# Altium PCB AD_STM32_PCB.PcbDoc
Units mm, origin at the board's own origin, x right, y up, seen from the top; angles counter-clockwise.
Board outline 44.75 x 23.25 mm, 2 copper layers (Top Layer, Bottom Layer), stack 1.67 mm thick; 30 components, 26 nets, 139 pads, 20 vias.
Unrouted connection lines stored in the file: 4.
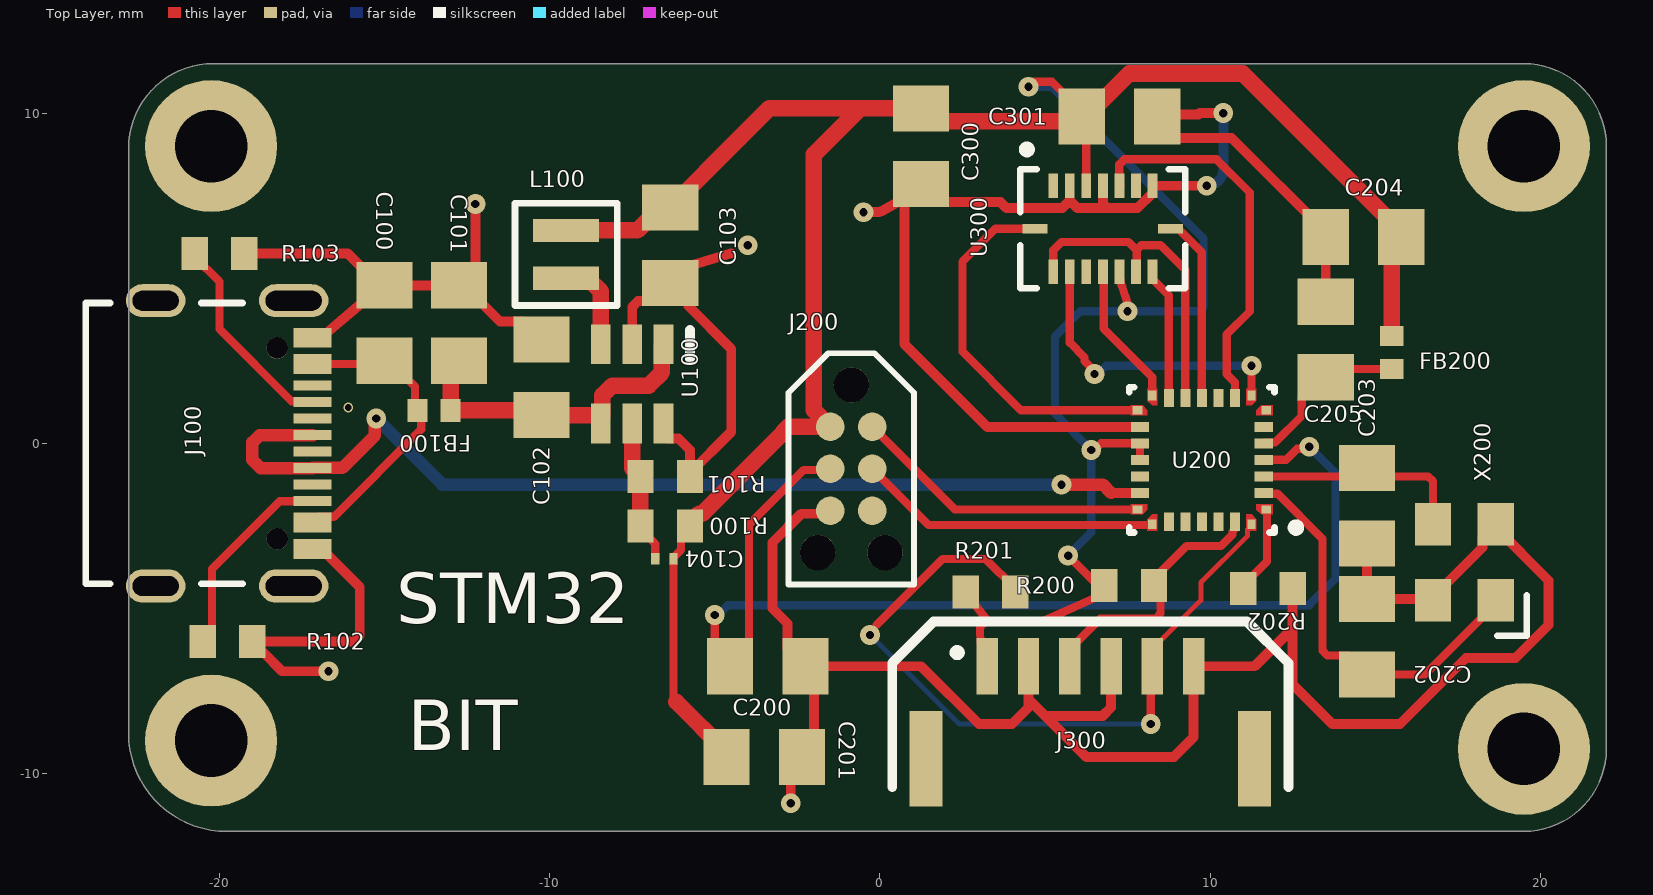
[diagram p0: Top Layer view]
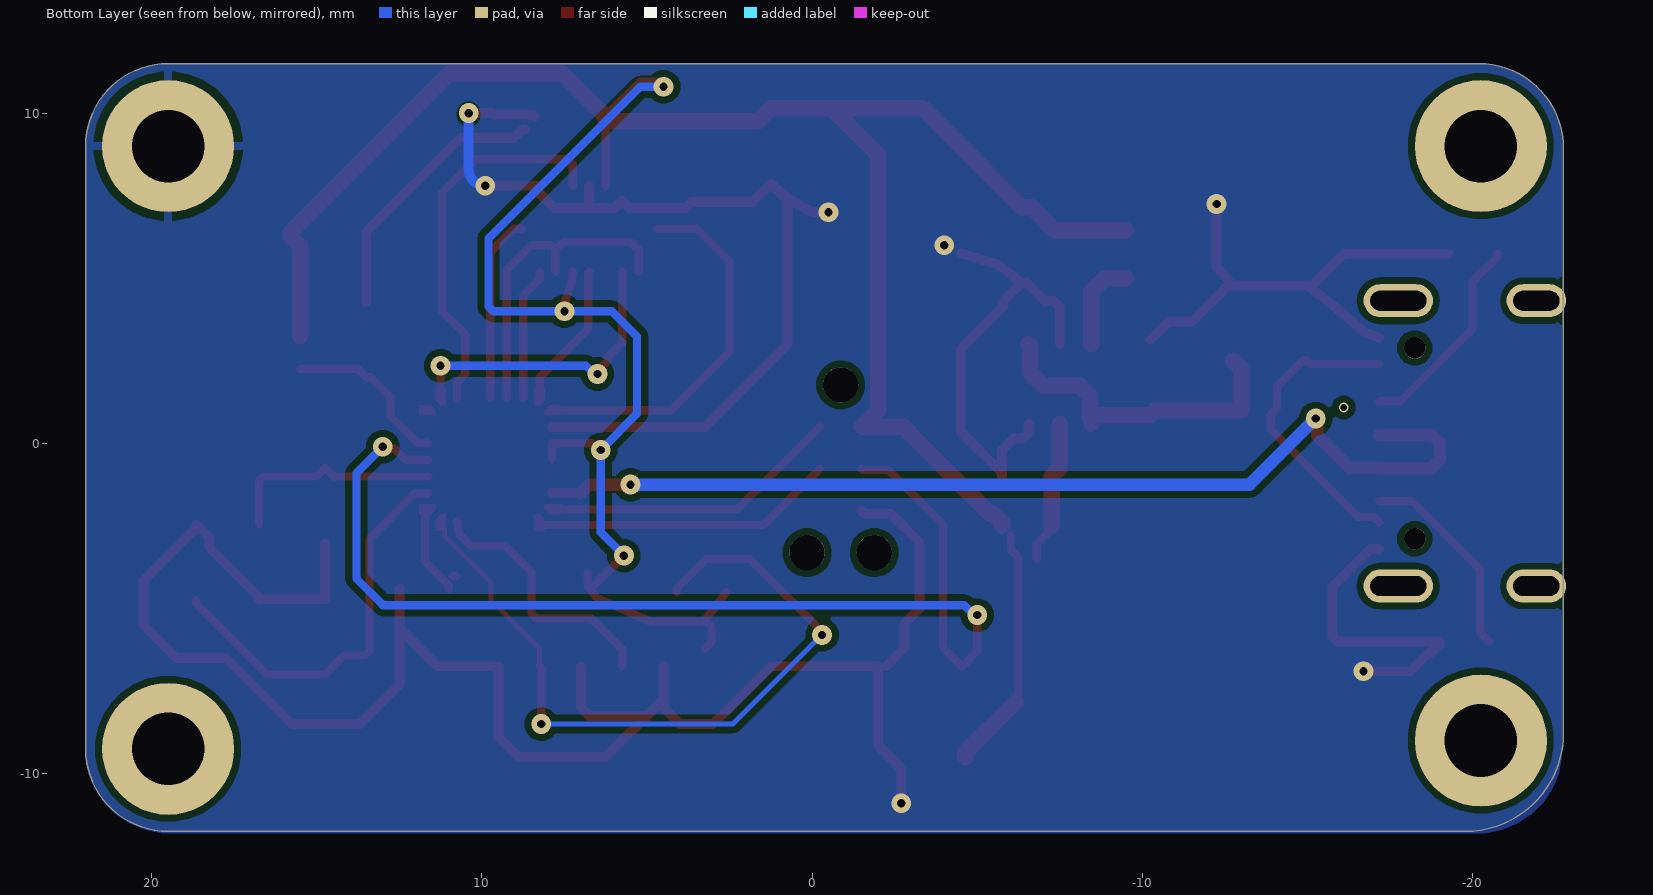
[diagram p1: Bottom Layer view, seen from below]
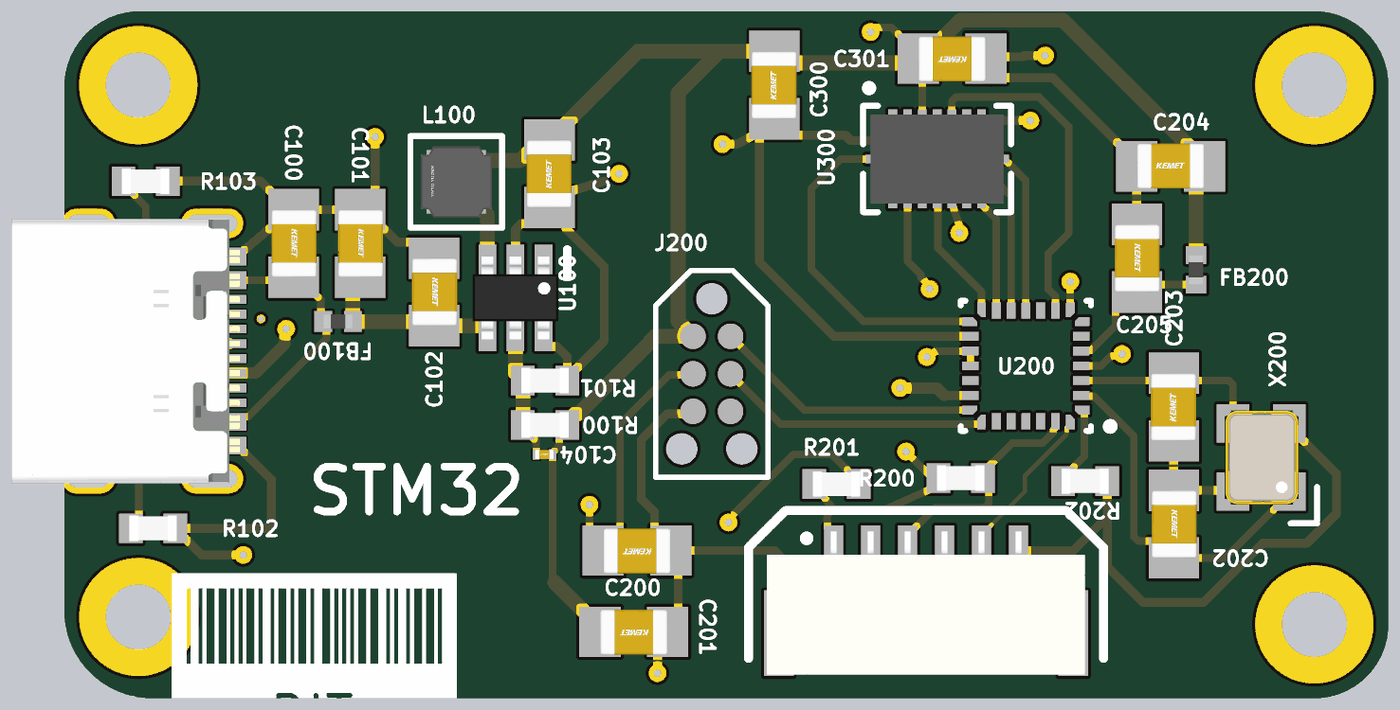
[diagram p2: 3D render of the assembled board from above, using the file's embedded part models]

## Layer stack, top to bottom
Top Solder: solder mask 0.0254, SM-001, Dk 4
Top Layer: signal copper 0.035
Dielectric 1: core 1.6, Core-043, Dk 4.6
Bottom Layer: signal copper 0.035
Bottom Solder: solder mask 0.0254, SM-001, Dk 4

## Board outline
-22.75,-8.775 -22.75,8.939 cw(c-20.189,8.939) -20.189,11.5 19.5,11.5 cw(c19.5,9) 22,9 22,-9.25 cw(c19.5,-9.25) 19.5,-11.75 -19.775,-11.75 cw(c-19.775,-8.775)

## Design rules (kind name [scope] priority, off if disabled: settings)
Clearance [All] p1: gap=0.2 ignorepadtopadclearanceinfootprint=FALSE except(0: Arc-Hole Track-Hole SMDPad-Hole THPad-Hole Via-Hole Fill-Hole Poly-Hole Region-Hole Text-Hole; 0.15: Arc-Arc Arc-Track Arc-SMDPad Track-Track Track-SMDPad SMDPad-SMDPad; 0.3: Arc-THPad Track-THPad SMDPad-THPad THPad-THPad)
DiffPairsRouting [All] p1: maxlimit=0.254 minlimit=0.254 mostfreqgap=0.254 toplayer_minwidth=0.381 toplayer_maxwidth=0.381 toplayer_prefwidth=0.381 bottomlayer_minwidth=0.381 bottomlayer_maxwidth=0.381 bottomlayer_prefwidth=0.381 maxuncoupledlength=12.7
PolygonConnect [All] p1: thpad.connectstyle=Relief thpad.reliefconductorwidth=0.254 thpad.reliefentries=4 thpad.polygonreliefangle="90 Angle" thpad.airgapwidth=0.254 smdpad.connectstyle=Relief smdpad.reliefconductorwidth=0.254 smdpad.reliefentries=4 smdpad.polygonreliefangle="90 Angle" smdpad.airgapwidth=0.254 via.connectstyle=Direct via.reliefconductorwidth=0.254 via.reliefentries=4 via.polygonreliefangle="90 Angle" via.airgapwidth=0.254
RoutingVias [All] p1: holewidth=0.25 width=0.7 viastyle="Through Hole" minholewidth=0.25 minwidth=0.6 maxholewidth=0.3 maxwidth=0.7
SolderMaskExpansion [All] p1: expansion=0.102 istentingtop=FALSE
UnRoutedNet [All] p1: checkbadconnections=TRUE
Width [All] p1: maxlimit=1 minlimit=0.15 preferedwidth=0.3
28 further rules are at their usual default settings.

## Classes and differential pairs
differential pair USB_D: +USB_D_P -USB_D_N

## Components (designator, comment, footprint, x,y, rotation, side; value= is the part's Value field where it differs from the comment)
C100 "100n" CAP_0805 -15,3.643 r270 top
C101 "100n" CAP_0805 -12.75,3.643 r270 top
C102 "4u7" CAP_0805 -10.25,2 r270 top
C103 "4u7" CAP_0805 -6.35,6 r90 top
C104 "22p" CAP_0201 -6.525,-3.5 r0 top
C200 "100n" CAP_0805 -3.393,-6.75 r180 top
C201 "100n" CAP_0805 -3.5,-9.5 r180 top
C202 "10p" CAP_0805 14.75,-5.857 r270 top
C203 "10p" CAP_0805 14.75,-1.893 r90 top
C204 "100n" CAP_0805 14.643,6.25 r0 top
C205 "100n" CAP_0805 13.5,3.143 r270 top
C300 "100n" CAP_0805 1.25,9 r90 top
C301 "100n" CAP_0805 7.257,9.9 r180 top
FB100 "120R" FB_0402 -13.5,1 r0 top
FB200 "120R" FB_0402 15.5,2.75 r270 top
J100 "USB4105-GF-A-060" USB4105-GF-A-060 -19.553,0 r270 top
J200 "TC2030-NL" TC2030-NL-FP -0.865,-0.77 r270 top locked
J300 "SM06B-GHS-TB" SM06B-GHS-TB 6.375,-8.15 r0 top
L100 "10u" FP-NRH2412-MFG -9.5,5.725 r90 top
R100 "887k" RES_0603 -6.5,-2.5 r0 top
R101 "280k" RES_0603 -6.5,-1 r180 top
R102 "5k1" RES_0603 -19.75,-6 r180 top
R103 "5k1" RES_0603 -20,5.75 r180 top
R200 "5k1" RES_0603 7.55,-4.3 r180 top
R201 "5k1" RES_0603 3.35,-4.5 r180 top
R202 "5k1" RES_0603 11.75,-4.4 r180 top
U100 "LTC3405ES6#TRMPBF" SOT-23-6 -7.5,1.8 r180 top
U200 "STM32F042G4U6TR" STM-UFQFPN28_V 9.75,-0.5 r180 top
U300 "BMI088" BMI088 6.75,6.5 r0 top
X200 "24MHz" XTAL_3225 17.7,-3.6 r90 top

## Footprints (in the part's own frame and the unit in brackets; to place one, negate y for a bottom-side part, rotate by r counter-clockwise, add the part's x,y. Pads: shape width x height; smd on the part's side, far side on the other; paste and mask are expansions set on the pad)
BMI088 [mm]
  rect 0.3x0.75 smd: 1(-1.5,1.3) 2(-1,1.3) 3(-0.5,1.3) 4(0,1.3) 5(0.5,1.3) 6(1,1.3) 7(1.5,1.3) 9(1.5,-1.3) 10(1,-1.3) 11(0.5,-1.3) 12(0,-1.3) 13(-0.5,-1.3) 14(-1,-1.3) 15(-1.5,-1.3)
  rect 0.75x0.3 smd: 8(2.05,0) 16(-2.05,0)
  silkscreen extent -2.5,-1.8 2.5,2.51, body extent -2.25,-1.5 2.25,1.5, height 1.01
CAP_0201 [mm]
  rect 0.25x0.35 smd mask+0.05: 1(-0.275,0) 2(0.275,0)
  body extent -0.32,-0.17 0.32,0.16, height 0.34
CAP_0805 [mm]
  rect 1.4x1.7 smd: 1(-1.143,0) 2(1.143,0)
  body extent -1.15,-0.76 1.15,0.79, height 1.01
FB_0402 [mm]
  rect 0.6x0.7 smd: 1(-0.5,0) 2(0.5,0)
  body extent -0.5,-0.25 0.5,0.25, height 0.51
FP-NRH2412-MFG [mm]
  rect 0.7x2 smd paste+0 mask+0: 1(-0.725,0) 2(0.725,0)
  silkscreen extent -1.55,-1.55 1.55,1.55, body extent -1.35,-1.35 1.35,1.35, height 0.25
RES_0603 [mm]
  rect 0.8x1 smd: 1(-0.75,0) 2(0.75,0)
  body extent -0.8,-0.43 0.8,0.43, height 0.52
SM06B-GHS-TB [mm]
  rect 0.65x1.7 smd: 1(-3.125,1.4) 2(-1.875,1.4) 3(-0.625,1.4) 4(0.625,1.4) 5(1.875,1.4) 6(3.125,1.4)
  rect 1x2.9 smd: ""(-4.975,-1.4) ""(4.975,-1.4)
  silkscreen extent -6,-2.25 6,2.75, body extent -5.38,-2.8 5.38,2.05, height 4.26
SOT-23-6 [mm]
  rect 0.6x1.2 smd: 1(-0.95,-1.2) 2(0,-1.2) 3(0.95,-1.2) 4(0.95,1.2) 5(0,1.2) 6(-0.95,1.2)
  silkscreen extent -1.75,-1.63 -1.75,-0.76, body extent -1.45,-1.4 1.45,1.4, height 1.45
STM-UFQFPN28_V [mm] "QFN, 28-Leads, Body 4.1x4.1mm, Pitch 0.5mm"
  rect 0.3x0.25 smd: 1(-1.95,1.5) 7(-1.95,-1.5) 15(1.95,-1.5) 21(1.95,1.5)
  rect 0.55x0.3 smd: 2(-1.875,1) 3(-1.875,0.5) 4(-1.875,0) 5(-1.875,-0.5) 6(-1.875,-1) 16(1.875,-1) 17(1.875,-0.5) 18(1.875,0) 19(1.875,0.5) 20(1.875,1)
  rect 0.25x0.3 smd: 8(-1.5,-1.95) 14(1.5,-1.95) 22(1.5,1.95) 28(-1.5,1.95)
  rect 0.3x0.55 smd: 9(-1,-1.875) 10(-0.5,-1.875) 11(0,-1.875) 12(0.5,-1.875) 13(1,-1.875) 23(1,1.875) 24(0.5,1.875) 25(0,1.875) 26(-0.5,1.875) 27(-1,1.875)
  Top Layer region: 1.35,2.15 1.35,1.65 1.505,1.65 1.65,1.795 1.65,2.15
  Top Layer region: 2.15,-1.35 1.65,-1.35 1.65,-1.505 1.795,-1.65 2.15,-1.65
  Top Layer region: -2.15,1.35 -1.65,1.35 -1.65,1.505 -1.795,1.65 -2.15,1.65
  Top Layer region: 2.15,1.35 1.65,1.35 1.65,1.505 1.795,1.65 2.15,1.65
  Top Layer region: 1.35,-2.15 1.35,-1.65 1.505,-1.65 1.65,-1.795 1.65,-2.15
  Top Layer region: -1.35,2.15 -1.35,1.65 -1.505,1.65 -1.65,1.795 -1.65,2.15
  Top Layer region: -1.35,-2.15 -1.35,-1.65 -1.505,-1.65 -1.65,-1.795 -1.65,-2.15
  Top Layer region: -2.15,-1.35 -1.65,-1.35 -1.65,-1.505 -1.795,-1.65 -2.15,-1.65
  silkscreen extent -2.98,-2.2 2.2,2.2, body extent -2.05,-2.05 2.05,2.05, height 0.6
TC2030-NL-FP [mil]
  round 33.98 smd: 1(-50,-25) 2(-50,25) 3(0,-25) 4(0,25) 5(50,-25) 6(50,25)
  round 42.01 hole 42.01 unplated: MH(-100,0) MH(100,40) MH(100,-40)
  silkscreen extent -138,-75 138,75
USB4105-GF-A-060 [mm]
  rect 0.6x1.15 smd mask+0.05: A1,B12(-3.2,2.378) A4,B9(-2.4,2.378) B1,A12(3.2,2.378) B4,A9(2.4,2.378)
  rect 0.3x1.15 smd mask+0.05: A5(-1.25,2.378) A6(-0.25,2.378) A7(0.25,2.378) A8(1.25,2.378) B5(1.75,2.378) B6(0.75,2.378) B7(-0.75,2.378) B8(-1.75,2.378)
  round 0.65 hole 0.65 unplated mask+0.05: MH(-2.89,1.303) MH(2.89,1.303)
  oval 1x2.1 hole 0.6 slot 1.7 at 90 deg: SH(-4.32,1.803) SH(4.32,1.803)
  oval 1x1.8 hole 0.6 slot 1.4 at 90 deg: SH(-4.32,-2.377) SH(4.32,-2.377)
  silkscreen extent -4.25,-4.5 4.25,0.25, body extent -4.47,-4.97 4.47,2.73, height 3.27
XTAL_3225 [mm]
  rect 1.3x1.1 smd: 1(-1.15,-0.95) 2(1.15,-0.95) 3(1.15,0.95) 4(-1.15,0.95)
  silkscreen extent -2.23,-1.89 -1,-1, body extent -1.6,-1.28 1.6,1.22, height 0.61

## Part data
C100 C101 C102 C103 C104 C200 C201 C202 C203 C204 C205 C300 C301: library part CAP_0805_16V, "Capacitor SMD 0805 16V"
FB100 FB200: library part FB_0402, "Ferrite Bead SMD 0402"
J100: "USB Connector Type C SMT 12 Pin", Manufacturer=GCT, Manufacturer Part Number=USB4105-GF-A-060
J200: "Tag-Connect No-Solder SWD Debug Connector (No Legs) DO NOT PLACE", Manufacturer=Tag-Connect, Manufacturer Part Number=TC2030-NL-FP
J300: "Header Connector 6 Position 1.25MM Pitch SMD Horizontal JST GH", Manufacturer=JST, Manufacturer Part Number=SM06B-GHS-TB
L100: library part CMP-14484-000582-1, "Shielded Wirewound Inductor 10uH 20% 0.51A 0.72Ω SMD", Case/Package=Nonstandard, Current Rating=450mA, DC Resistance (DCR)=600mR, Inductance=10uH, Max DC Current=810mA, Max Operating Temperature=120°C, Min Operating Temperature=-25°C, Package Quantity=2500, Self Resonant Frequency=29MHz, Test Frequency=100kHz, Tolerance=20%, Core Material=Ferrite, Halogen Free="Halogen Free", Height=1.2mm, Height - Seated (Max)=0.047inch, Length=0.095inch, Mount="Surface Mount", Packaging="Tape and Reel", RoHS Compliant=Yes, Saturation Current=810mA, Shielding=Shielded, Termination=SMD/SMT, Width=0.095inch
R100 R101 R102 R103 R200 R201 R202: library part RES_0603, "Resistor SMD 0603"
U100: "1.5MHz, 300mA / Synchronous Step-Down / Regulator in ThinSOT", Manufacture=Analogdevices, Manufacture Part Number=LTC3405ES6#TRMPBF
U200: library part CMP-0304-00110-4, "ARM Cortex-M0 32-bit MCU, 16 KB Flash, 6 KB Internal RAM, 24 I/Os, 28-Pin UFQFPN, -40 to 85 degC, Tape and Reel", I/Os (High Current)=24, Manufacturer=STMicroelectronics, Operating Frequency(F) (Processor speed) (MHz)=48, Package Description="28-Pin Ultra Thin Fine Pitch Quad Flat No-Lead, 4 x 4 x 0.6 mm Body, 0.5 mm Pitch", Package Reference=UFQFPN28, Supply Voltage(Vcc) min (V)=2, ComponentLink1Description="Manufacturer URL", ComponentLink1URL=http://www.st.com/, ComponentLink2Description=Datasheet, ComponentLink2URL=http://www.st.com/st-web-ui/static/active/en/resource/technical/document/datasheet/DM00105814.pdf, Core="ARM Cortex-M0", DatasheetVersion="Rev. 5", FLASH Size (Prog) (kB)=16, Internal RAM Size (kB)=6, Mounting Technology="Surface Mount", Packing="Tape and Reel", PartNumber=STM32F042G4U6TR
U300: "Inertial Measurement Unit IMU 6-Axis LGA", Manufacturer=Bosch, Manufacturer Part Number=BMI088
X200: library part TSX-3225_24.0000MF15X-AC, "Crystal SMD 24MHz 10PPM 7pF 3225", Load Capacitance=7pF, Manufacturer=Epson, Manufacturer Number="TSX-3225 24.0000MF15X-AC", ESR=40R, Type=XTAL

## Free pads (board coordinates)
  round 4 hole 2.2: MH(-20.25,-9) MH(-20.25,9) MH(19.5,-9.25) MH(19.5,9)

## Via types
v1: diameter 0.6, hole 0.25, Top Layer to Bottom Layer, 19 vias
v2: diameter 0.3, hole 0.2, Top Layer to Bottom Layer, 1 vias

## Nets (pads, with @x,y where several pads share a name; then routed paths per layer and width w, separated by ;. In a path a pad name is that pad's centre, name@x,y a point inside that pad or via, vN(x,y) a via of type N, cw(c..) or ccw(c..) an arc to the next point about the centre after c; other vN are vias at no path point)
+3V3: C103.2 C104.2 C201.2 C204.2 C300.2 C301.2 FB200.1 J200.1 J300.1 L100.2 R100.2 R200.2 R201.2 U200.17 U200.18 U300.3 U300.11 | length 92.6
  Top Layer w0.25: C104.2 -6.25,-7.743 -6.166,-7.827 ; C104.2@-6.25,-3.45 -6.025,-3.225 R100.2@-6.025,-2.775 ; R201.2 2.875,-4.875 3.278,-5.4 ; J300.1@3.25,-6.225 3.05,-6.025 3.028,-5.665 cw(c3.278,-5.65) 3.278,-5.4 ; v1@4.664,10.95 5.214,10.95 6.114,10.05 C301.2 ; v1(5.7,-3.4) 6.1,-3.8 R200.2@6.715,-4.415 ; U300.3 C301.2@6.25,9.75 ; v1(6.4,-0.2) 6.495,-0.2 6.695,0 U200.17 U200.18 ; R200.2@6.8,-3.925 R200.2 R200.2@6.715,-4.415 ; U300.11 7.275,4.95 7.337,4.746 ccw(c7.6,4.825) 7.339,4.739 v1@7.5,4.25 ; 3.278,-5.4 4.847,-5.4 ccw(c4.847,-5.15) 4.949,-5.378 6.525,-4.675 R200.2@6.715,-4.415
  Top Layer w0.5: L100.2 -7.343,6.45 -6.65,7.143 C103.2 -4.25,9.243 -4.25,9.25 -3.357,10.143 -0.607,10.143 ; -6.166,-7.827 -4.643,-9.35 C201.2 ; R100.2 -5.75,-2.4 -5.475,-2.125 -5.375,-2.125 -2.929,0.321 -2.929,0.354 -2.783,0.5 J200.1 -2,1 -2,8.75 -0.607,10.143 ; C301.2@6.25,9.75 1.643,9.75 C300.2 -0.607,10.143 ; C301.2@6.25,9.9 7.55,11.2 10.986,11.2 15.786,6.4 C204.2 15.5,5.964 FB200.1
  Bottom Layer w0.25: v1(4.5,10.8) 5.2,10.8 9.8,6.2 9.8,4.146 9.654,4 v1(7.5,4) 6.06,4 5.3,3.24 5.3,0.9 v1(6.4,-0.2) 6.4,-2.7 v1(5.7,-3.4)
+3V3A: C205.2 FB200.2 U200.5 | length 5.2
  Top Layer w0.25: U200.5 11.65,0.025 11.964,0.025 12.775,0.836 12.775,1.425 13.35,2 C205.2 13.75,2.25 FB200.2
+5V: C101.2 C102.2 FB100.2 U100.1 U100.4 | length 10
  Top Layer w0.5: C101.2 -13,2.25 FB100.2 -10.393,1 C102.2 -8.625,0.857 -8.5,0.732 -8.45,0.682 U100.4 ; U100.4@-8.4,0.832 -8.4,1.457 -8.107,1.75 -7,1.75 -6.6,2.15 -6.6,2.95 U100.1
+VUSB: C100.2 FB100.1 J100.A4,B9 J100.B4,A9 | length 9.2
  Top Layer w0.25: -17.175,-2.4 -17,-2.225 -16.536,-2.225 -13.89,0.421 -13.89,0.89 FB100.1 ; -17.175,2.4 -15.1,2.4 C100.2 -14.85,2.5 -14.075,1.725 FB100.1@-14.075,1.075
BOOT0: R202.2 U200.1 | length 2.8
  Top Layer w0.25: R202.2@10.775,-4.025 R202.2@10.885,-4.025 ; R202.2 11,-4.3 11.725,-3.575 11.725,-2 U200.1
"BUCK SW": L100.1 U100.3 | length 2.8
  Top Layer w0.5: L100.1 -8.85,5 -8.45,4.6 U100.3
"BUCK VFB": C104.1 R100.1 R101.2 U100.5 | length 4.4
  Top Layer w0.25: R100.1 -7.25,-2.6 -6.8,-3.05 C104.1
  Top Layer w0.5: U100.5 -7.5,-0.75 R101.2 R100.1
GND: C100.1 C101.1 C102.1 C103.1 C200.1 C201.1 C202.1 C203.1 C204.1 C205.1 C300.1 C301.1 J100.A1,B12 J100.B1,A12 J200.5 J300.2 J300.4 J300.6 pad.MH@19.5,9 R101.1 R102.1 R103.1 R202.1 U100.2 U100.6 U200.16 U300.2 U300.4 U300.6 U300.7 X200.2 X200.4 | length 133.5
  Top Layer w0.3: R103.1 -16.114,5.75 -15.15,4.786 C100.1 ; -17.175,-3.2 -16.9,-3.2 -15.75,-4.35 -15.75,-5.824 -15.926,-6 R102.1 -19,-6.1 -18.75,-6.35 -18.65,-6.35 -18.1,-6.9 v1(-16.7,-6.9) ; -17.175,3.2 -16.75,3.35 -15.7,4.236 C100.1 ; v1@-12.25,7 -12.25,5.336 C101.1 ; C102.1 -10.8,3.693 -11.507,3.693 -12.6,4.786 C101.1 ; U100.2 -7.5,4.131 -7.324,4.307 -7.05,4.307 -6.5,4.857 C103.1 ; U100.6 -6.55,0.3 -6.4,0.15 -6.1,0.15 -5.75,-0.2 R101.1@-5.75,-0.9 ; R101.1 R101.1@-5.75,-0.9 ; -4.5,5.75 -5.65,5.407 C103.1 ; v1(-2.7,-10.9) -2.7,-9.843 -2,-9.143 -2,-6.75 1.25,-6.75 3,-8.5 4,-8.5 4.5,-8 4.5,-7.75 ; C200.1 -2.8,-6.2 -2.8,-5.45 -3.25,-5 -3.25,-3 -2.381,-2.131 -1.591,-2.131 J200.5 ; v1@-0.25,7 -0.078,7 ccw(c-0.078,7.3) 0.068,7.038 0.55,7.307 0.698,7.423 C300.1 ; J300.2 4.5,-7.75 ; U300.4 6.75,7.263 6.888,7.125 ; J300.4 7,-8 6.75,-8.25 5,-8.25 ; U200.16 3.25,0.5 0.75,3 0.75,7.357 C300.1 ; U300.7@8.25,7.575 7.8,7.125 6.888,7.125 ; U300.7 v1(9.9,7.8) ; C301.1 8.457,9.957 9.643,9.957 9.685,10 v1(10.4,10) ; C301.1@8.7,9.5 8.786,9.5 9.036,9.25 10.65,9.25 13.5,6.4 C204.1 C205.1 ; R202.1 12.5,-5.6 ; C203.1 C202.1 16.714,-4.714 X200.4 16.75,-4.65 18.25,-3.15 18.25,-2.85 X200.2 18.65,-2.55 20.25,-4.15 20.25,-5.5 19.25,-6.5 17.75,-6.5 15.75,-8.5 13.7,-8.5 12.5,-7.3 12.5,-5.6 ; C100.1 C101.1 ; C103.1 -5.8,4.307 -5.8,4.157 -4.5,2.857 -4.5,0.35 R101.1@-5.75,-0.9 ; C300.1 1.8,7.307 3.646,7.307 3.828,7.125 5.524,7.125 5.75,7.351 5.976,7.125 6.888,7.125 ; 4.5,-7.75 5,-8.25 ; 5,-8.25 6.25,-9.5 8.9,-9.5 9.5,-8.9 J300.6 11.35,-6.75 12.5,-5.6
  Bottom Layer w0.3: v1(9.9,7.8) ccw(c9.9,8.3) 10.4,8.3 v1(10.4,10)
  other v1: -4,6 -0.5,7 -12.25,7.25
I2C_SCL: J300.3 R200.1 U200.27 | length 8
  Top Layer w0.25: J300.3 5.75,-6.225 6.675,-5.3 8.354,-5.3 8.5,-5.154 8.5,-3.9 9.292,-3.108 10.33,-3.108 10.675,-2.764 10.675,-2.671 10.725,-2.621 10.725,-2.4 U200.27
I2C_SDA: J300.5 R201.1 U200.28 | length 22.4
  Top Layer w0.15: J300.5 8.25,-6.225 9.721,-4.754 9.721,-4.213 11.125,-2.809 11.125,-2.6 11.25,-2.475 U200.28
  Top Layer w0.25: -0.1,-5.5 1.9,-3.5 3.2,-3.5 4.1,-4.4 R201.1 ; v1(8.2,-8.5) 8.2,-6.8 J300.5
  Bottom Layer w0.15: v1(-0.3,-5.8) 2.4,-8.5 v1(8.2,-8.5)
IMU_INT1: U200.15 U300.16 | length 11.4
  Top Layer w0.25: U300.16 3.5,6.5 2.5,5.5 2.5,2.775 4.275,1 U200.15
IMU_INT2: U200.14 U300.12 | length 4.4
  Top Layer w0.25: U300.12 6.775,5.175 6.775,3.475 8.25,2 U200.14
IMU_MISO: U200.12 U300.10 U300.15 | length 9.8
  Top Layer w0.25: U300.15 5.25,5.85 5.5,6.1 7.529,6.1 7.775,5.854 ; U300.10 7.775,5.225 7.775,5.854 ; U200.12 9.25,5.25 8.5,6 7.921,6 7.775,5.854
IMU_MOSI: U200.13 U300.9 | length 4
  Top Layer w0.25: U300.9 8.25,4.975 8.75,4.475 U200.13
IMU_NCS_ACC: U200.8 U300.14 | length 9.2
  Top Layer w0.25: U300.14 5.75,3.05 6.198,2.602 6.198,2.497 6.5,2.195 v1(6.5,2.1) ; U200.8 v1(11.25,2.35)
  Bottom Layer w0.25: v1(6.5,2.1) 6.595,2.1 6.845,2.35 v1(11.25,2.35)
IMU_NCS_GYR: U200.9 U300.5 | length 11.7
  Top Layer w0.25: U300.5@7.275,7.825 U300.5 7.25,8.45 7.4,8.6 10.2,8.6 11.2,7.6 11.2,4 10.5,3.3 10.5,2.1 10.75,1.85 U200.9
IMU_SCK: U200.11 U300.8 | length 5.7
  Top Layer w0.25: U300.8 9.025,6.5 9.75,5.775 U200.11
NRST: C200.2 J200.3 U200.4 | length 34.4
  Top Layer w0.25: v1@-5,-5.4 -5,-6.286 C200.2 -3.961,-6.175 -3.961,-2.461 -2.306,-0.806 -1.536,-0.806 J200.3 ; U200.4 12.3,-0.5 12.633,-0.167 12.933,-0.167 v1(13,-0.1)
  Bottom Layer w0.25: v1(-5,-5.2) -4.905,-5.2 -4.605,-4.9 13,-4.9 13.8,-4.1 13.8,-0.9 v1(13,-0.1)
OSC_IN: C202.2 U200.2 X200.1 | length 12.3
  Top Layer w0.25: U200.2 11.65,-1.525 12.035,-1.525 13.4,-2.89 13.4,-6.279 13.546,-6.425 14.175,-6.425 C202.2 16.5,-7 18.65,-4.85 X200.1
OSC_OUT: C203.2 U200.3 X200.3 | length 6.7
  Top Layer w0.25: U200.3 14.5,-1 C203.2 15,-1 16.604,-1 16.75,-1.146 X200.3
SWCLK: J200.4 U200.22 | length 9.2
  Top Layer w0.25: J200.4 1.475,-2.475 8.25,-2.475 U200.22
SWDIO: J200.2 U200.21 | length 9.1
  Top Layer w0.25: J200.2 2.27,-2 U200.21
USB_CC1: J100.A5 R103.2 | length 6.3
  Top Layer w0.25: R103.2 -20.75,5.65 -20,4.9 -20,3.461 -17.814,1.275 -17.2,1.275 J100.A5
USB_CC2: J100.B5 R102.2 | length 6.2
  Top Layer w0.25: R102.2 -20.225,-5.725 -20.225,-3.804 -18.171,-1.75 J100.B5
USB_D_N: J100.A7 J100.B7 U200.19
  other v2: -16.1,1.087
USB_D_P: J100.A6 J100.B6 U200.20 | length 31.2
  Top Layer w0.3: 7,-1.5 U200.20
  Top Layer w0.381: J100.A6 -18.777,0.25 -19,0.027 -19,-0.5 -18.75,-0.75 J100.B6 -17.165,-0.74 -16.276,-0.74 -15.292,0.244 -15.292,0.708 v1(-15.25,0.75) ; v1(5.5,-1.25) 6.75,-1.25 7,-1.5
  Bottom Layer w0.381: v1(-15.25,0.75) -13.25,-1.25 v1(5.5,-1.25)
pads on no net: J100.A8 J100.B8 J100.MH J100.SH J200.6 J200.MH J300. U200.6 U200.7 U200.10 U200.23 U200.24 U200.25 U200.26 U300.1 U300.13

## Polygon pours and split planes (outlines as drawn)
GND on Bottom Layer "GND_L02_P000" (solid, pour order 0): -22.7,8.96 cw(c-20.16,8.96) -20.16,11.5 19.46,11.5 cw(c19.46,8.96) 22,8.96 22,-9.26 cw(c19.46,-9.26) 19.46,-11.8 -20.16,-11.8 cw(c-20.16,-9.26) -22.7,-9.26 -22.7,-0.2

## Silkscreen, mask and mechanical layers (free items; w line width, h text height)
Top Overlay:
  text "STM32" at -14.646,-5.446 h1.52
  text "BIT" at -14.3,-9.3 h1.52
Mechanical 1:
  lines w0.2: -22.75,-8.775 ccw(c-19.775,-8.775) -19.775,-11.75 19.5,-11.75 ccw(c19.5,-9.25) 22,-9.25 22,9 ccw(c19.5,9) 19.5,11.5 -20.189,11.5 ccw(c-20.189,8.939) -22.75,8.939 -22.75,-1.75 -22.75,-8.775